# Altium PCB Arm_V2.PcbDoc
Units mil, origin at the board's own origin, x right, y up, seen from the top; angles counter-clockwise.
Board outline 5375 x 5800 mil, 2 copper layers (Top Layer, Bottom Layer); 20 components, 33 nets, 160 pads, 1 vias.
Unrouted connection lines stored in the file: 2.
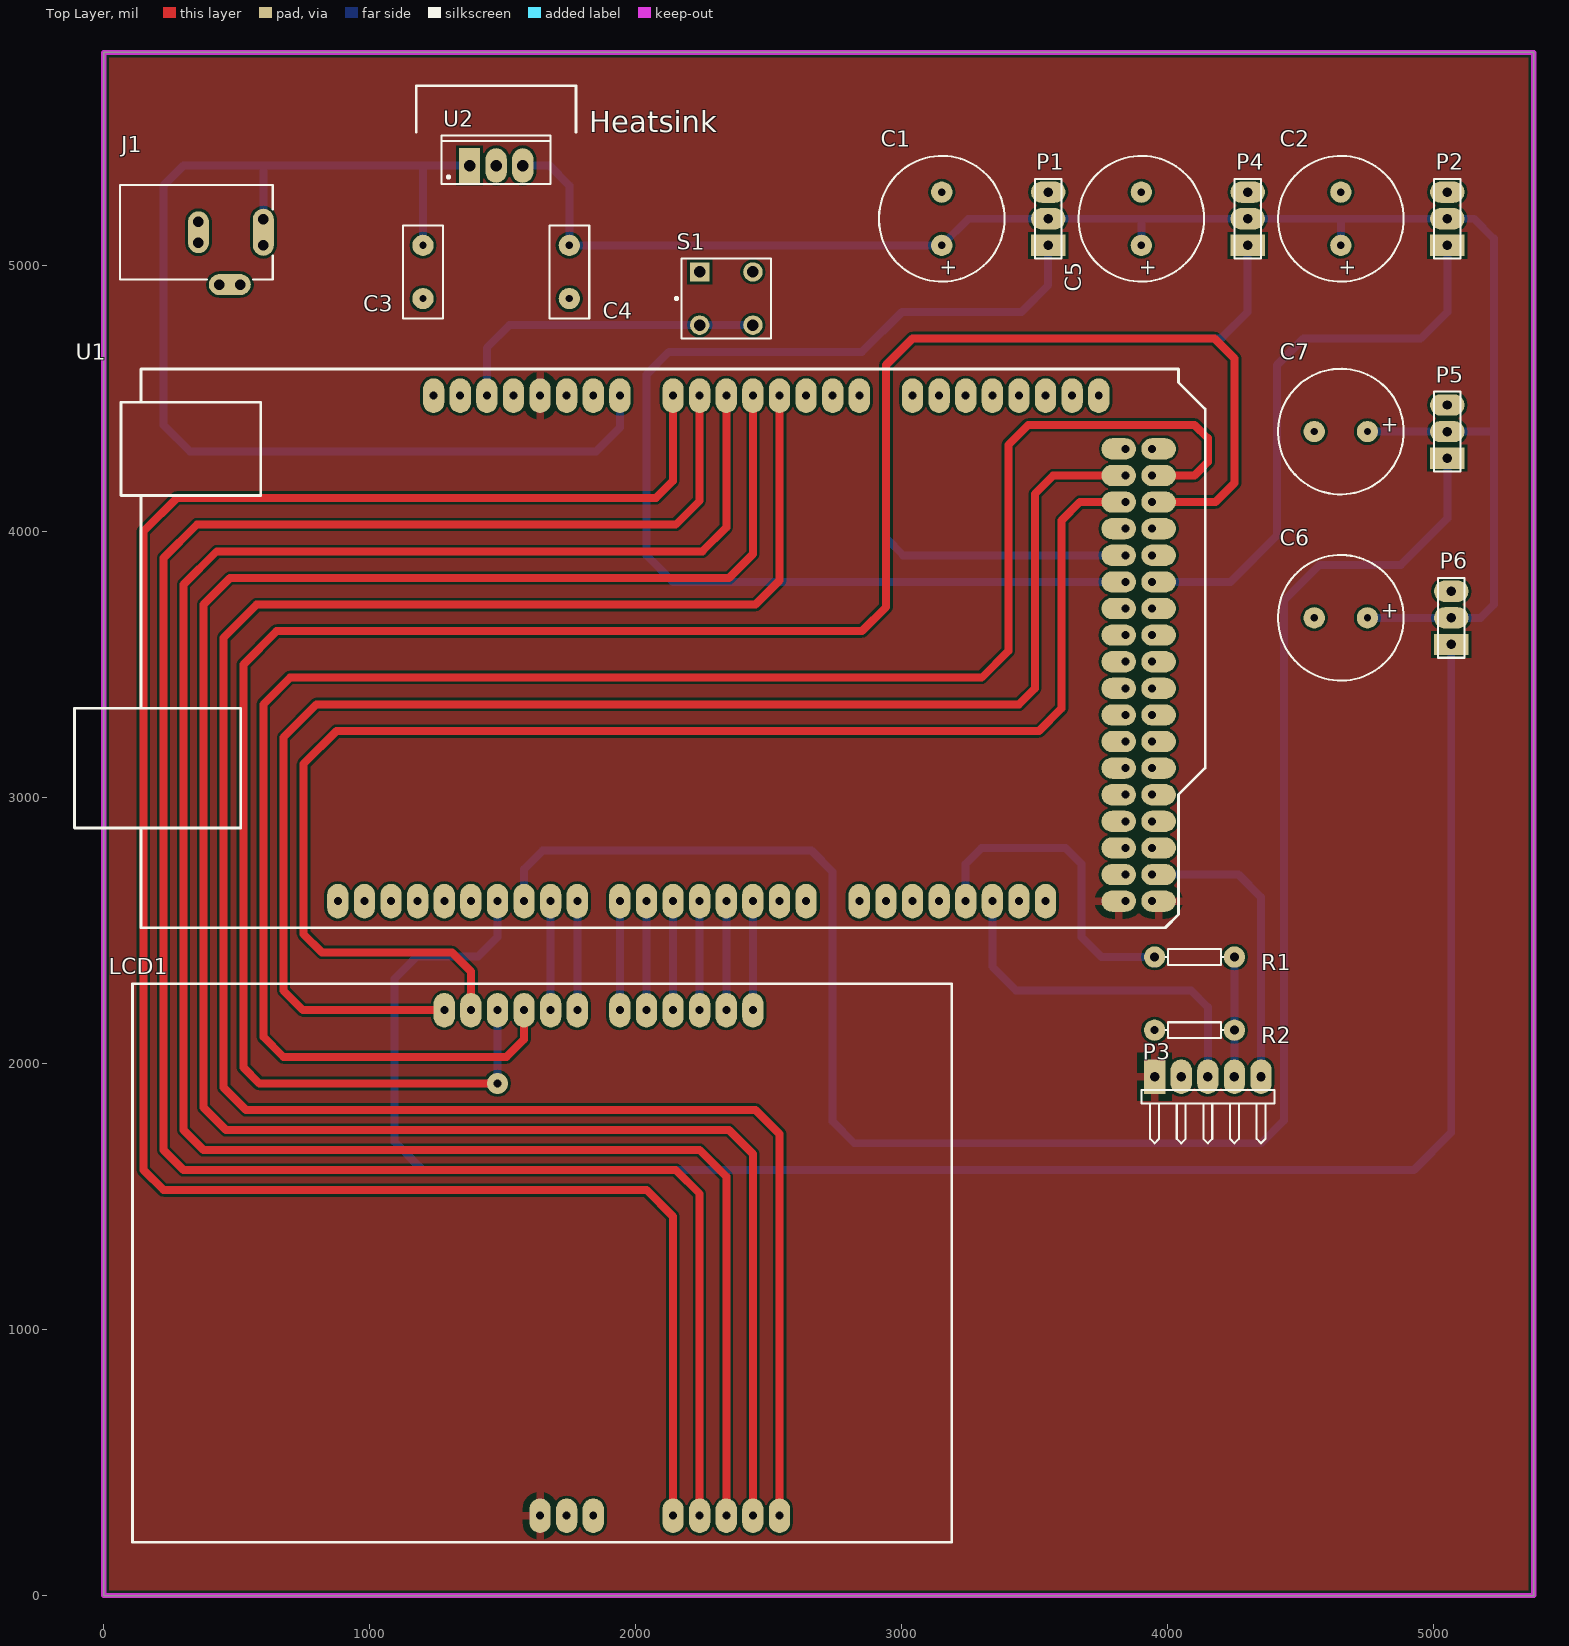
[diagram p0: Top Layer view]
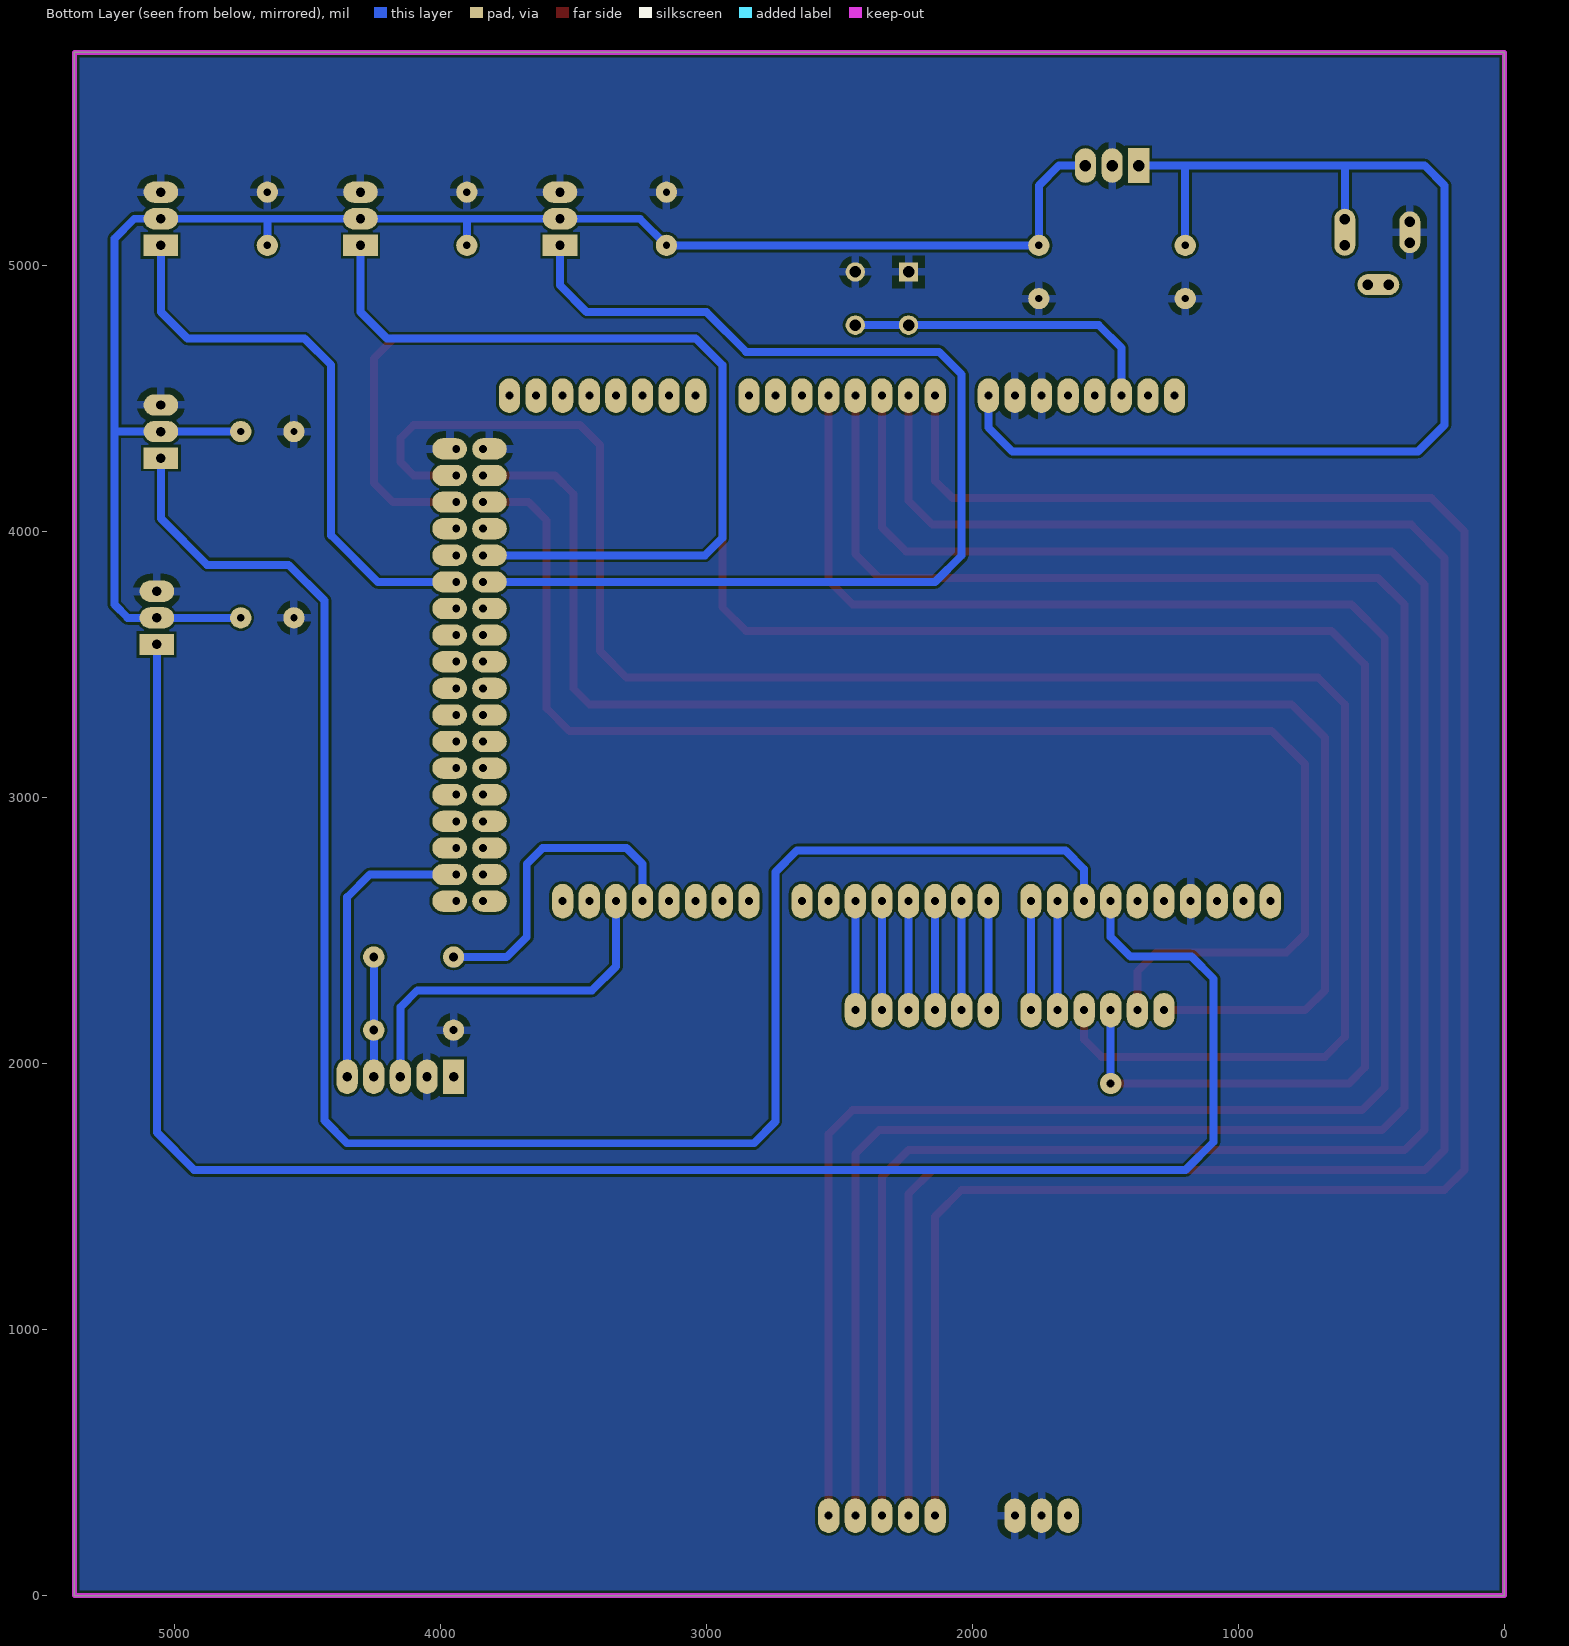
[diagram p1: Bottom Layer view, seen from below]

## Layer stack, top to bottom
Top Solder: solder mask 0.4, Solder Resist, Dk 3.5
Top Layer: signal copper 1.4
Dielectric 1: dielectric 12.6, FR-4, Dk 4.8
Bottom Layer: signal copper 1.4
Bottom Solder: solder mask 0.4, Solder Resist, Dk 3.5

## Board outline
0,0 5375,0 5375,5800 0,5800

## Design rules (kind name [scope] priority, off if disabled: settings)
Clearance [All] p1: gap=10 ignorepadtopadclearanceinfootprint=FALSE
PlaneClearance [All] p1: clearance=25
PlaneConnect [All] p1: planeconnectstyle=Relief reliefexpansion=25 reliefentries=4 reliefconductorwidth=30 reliefairgap=25
PolygonConnect [All] p1: connectstyle=Relief reliefconductorwidth=30 reliefentries=4 polygonreliefangle="90 Angle" airgapwidth=25
RoutingVias [All] p1: holewidth=30 width=80 viastyle="Through Hole" minholewidth=30 minwidth=80 maxholewidth=30 maxwidth=80
SolderMaskExpansion [All] p1: expansion=4
UnpouredPolygon [All] p1: allowunpoured=TRUE allowshelved=TRUE
Width [All] p1: maxlimit=30 minlimit=30 preferedwidth=30 minimp=50.000000 maximp=50.000000 favimp=50.000000
27 further rules are at their usual default settings.

## Components (designator, comment, footprint, x,y, rotation, side; value= is the part's Value field where it differs from the comment)
C1 "Cap Pol1" PCAP_3 3150,5175 r270 top value=470uF
C2 "Cap Pol1" PCAP_3 4650,5175 r270 top value=470uF
C3 "Cap" RAD-0.2 1200,4975 r90 top value=330nF
C4 "Cap" RAD-0.2 1750,4975 r90 top value=100nF
C5 "Cap Pol1" PCAP_3 3900,5175 r270 top value=470uF
C6 "Cap Pol1" PCAP_3 4650,3675 r0 top value=470uF
C7 "Cap Pol1" PCAP_3 4650,4375 r0 top value=470uF
J1 "PWR2.5" KLD-0202 60.63,5124.21 r0 top
LCD1 "Elegoo 2.8\" LCD_microSD" "Elegoo 2.8\" LCD w/h microSD" 108.11,200 r0 top
P1 "X_Axis" HDR1X3 3550,5075 r90 top
P2 "Y_Axis" HDR1X3 5050,5075 r90 top
P3 "HC-05" HDR1X5H 3950,1950 r0 top
P4 "Clamp" HDR1X3 4300,5075 r90 top
P5 "Header 3" HDR1X3 5050,4275 r90 top
P6 "Header 3" HDR1X3 5065,3575 r90 top
R1 "Res1" AXIAL-0.3#1 4100,2400 r180 top value=1K
R2 "Res1" AXIAL-0.3#2 4100,2125 r0 top value=2K
S1 "SW-DPST" DPST-4 2340,4825 r0 top
U1 "Arduino_Mega2560R3" ARDUINO_MEGA2560R3 140,2510 r0 top
U2 "L7805CV" TO220 1475,5375 r0 top

## Footprints (in the part's own frame and the unit in brackets; to place one, negate y for a bottom-side part, rotate by r counter-clockwise, add the part's x,y. Pads: shape width x height; smd on the part's side, far side on the other; paste and mask are expansions set on the pad)
ARDUINO_MEGA2560R3 [mil] "DIP: FOR REVERSE MOUNT"
  oval 80x130 hole 30: 0(1100,2000) 1(1200,2000) 2(1300,2000) 3(1400,2000) 4(1500,2000) 5(1600,2000) 6(1700,2000) 7(1800,2000) 8(2000,2000) 9(2100,2000) 10(2200,2000) 11(2300,2000) 12(2400,2000) 13(2500,2000) 14(2600,2000) 15(2700,2000) 16(2900,2000) 17(3000,2000) 18(3100,2000) 19(3200,2000) 20(3300,2000) 21(3400,2000) 22(3500,2000) 23(3600,2000) 24(740,100) 25(840,100) 26(940,100) 27(1040,100) 28(1140,100) 29(1240,100) 30(1340,100) 31(1440,100) 32(1540,100) 33(1640,100) 34(1800,100) 35(1900,100) 36(2000,100) 37(2100,100) 38(2200,100) 39(2300,100) 40(2400,100) 41(2500,100) 42(2700,100) 43(2800,100) 44(2900,100) 45(3000,100) 46(3100,100) 47(3200,100) 48(3300,100) 49(3400,100)
  oval 130x80 hole 30 copper offset 25,0: 50(3800,100) 51(3800,200) 52(3800,300) 53(3800,400) 54(3800,500) 55(3800,600) 56(3800,700) 57(3800,800) 58(3800,900) 59(3800,1000) 60(3800,1100) 61(3800,1200) 62(3800,1300) 63(3800,1400) 64(3800,1500) 65(3800,1600) 66(3800,1700) 67(3800,1800)
  oval 130x80 hole 30 copper offset -25,0: 68(3700,100) 69(3700,200) 70(3700,300) 71(3700,400) 72(3700,500) 73(3700,600) 74(3700,700) 75(3700,800) 76(3700,900) 77(3700,1000) 78(3700,1100) 79(3700,1200) 80(3700,1300) 81(3700,1400) 82(3700,1500) 83(3700,1600) 84(3700,1700) 85(3700,1800)
  silkscreen extent -250,0 4000,2100, body extent -100,1950 -100,1950, height 10
AXIAL-0.3#1 [mil] "Axial Device, Thru-Hole; 2 Leads; 0.3 in Pin Spacing"
  round 80 hole 33.46: 1(-150,0) 2(150,0)
  silkscreen extent -109,-30 109,30
AXIAL-0.3#2 [mil] "Axial Device, Thru-Hole; 2 Leads; 0.3 in Pin Spacing"
  round 80 hole 30: 1(-150,0)
  round 80 hole 33.46: 2(150,0)
  silkscreen extent -109,-30 109,30
DPST-4 [mm] "Switch; 4 Leads"
  rect 1.85x1.85 hole 1.1: 1(-2.54,3.81)
  round 1.85 hole 1.1: 2(-2.54,-1.27) 3(2.54,3.81) 4(2.54,-1.27)
  silkscreen extent -4.88,-2.54 4.28,5.08
"Elegoo 2.8\" LCD w/h microSD" [mil]
  oval 80x130 hole 30: 1(1531.89,100) 2(1631.89,100) 3(1731.89,100) 4(2031.89,100) 5(2131.89,100) 6(2231.89,100) 7(2331.89,100) 8(2431.89,100) 9(2331.89,2000) 10(2231.89,2000) 11(2131.89,2000) 12(2031.89,2000) 13(1931.89,2000) 14(1831.89,2000) 15(1671.89,2000) 16(1571.89,2000) 17(1471.89,2000) 18(1371.89,2000) 19(1271.89,2000) 20(1171.89,2000)
  silkscreen extent 0,0 3080,2100, body extent -100,1950 -100,1950, height 10
HDR1X3 [mil] "Connector; Header; 3 Position"
  rect 80x130 hole 35.43: 1(0,0)
  oval 80x130 hole 35.43: 2(100,0) 3(200,0)
  silkscreen extent -50,-50 250,50
HDR1X5H [mil] "Connector; Header; 5 Position; Right Angle"
  rect 80x130 hole 35.43: 1(0,0)
  oval 80x130 hole 35.43: 2(100,0) 3(200,0) 4(300,0) 5(400,0)
  silkscreen extent -50,-250 450,-50
KLD-0202 [mm] "DC Power Jack, 2.5mm, KLD Series, PCB Mount"
  oval 2x4.5 all layers, no hole: 1(13.7,0)
  round 1.5 hole 1: 1A(13.7,-1.25) 1B(13.7,1.25) 2A(7.5,-1) 2B(7.5,1) 3A(9.5,-5) 3B(11.5,-5)
  oval 2x4 all layers, no hole: 2(7.5,0)
  oval 4x2 all layers, no hole: 3(10.5,-5)
  silkscreen extent 0,-4.5 14.6,4.5
PCAP_3 [mil] "Polarized Capacitor (Radial); 2 Leads"
  round 80 hole 27.56: 1(100,0) 2(-100,0)
  silkscreen extent -236,-236 236,236
RAD-0.2 [mil] "Radial Cap, Thru-Hole; 2 Leads; 0.2 in Pin Spacing"
  round 80 hole 27.56: 1(-100,0) 2(100,0)
  silkscreen extent -175,-75 175,75
TO220 [mil] "TO, Thru-Hole, Vertical, Heatsink Mounted; 3 In-Line Leads; Pitch 2.54 mm"
  rect 80x130 hole 43.31: 1(-100,0)
  oval 80x130 hole 43.31: 2(0,0) 3(100,0)
  silkscreen extent -205,-69 205,112, body extent -207,-71 207,114, height 776

## Part data
C1 C2 C5 C6 C7: "Polarized Capacitor (Radial)", LatestRevisionDate=17-Jul-2002, LatestRevisionNote="Re-released for DXP Platform.", PackageDescription="Polarized Capacitor (Radial); 2 Leads", PackageReference=RB7.6-15, Published=8-Jun-2000, Publisher="Altium Limited"
C3 C4: "Capacitor", LatestRevisionDate=17-Jul-2002, LatestRevisionNote="Re-released for DXP Platform.", PackageDescription="Radial Cap, Thru-Hole; 2 Leads; 0.3 in Pin Spacing", PackageReference=RAD-0.3, Published=8-Jun-2000, Publisher="Altium Limited"
J1: "Low Voltage Power Supply Connector", ComponentLink1Description="Manufacturer Link", ComponentLink1URL=http://domino.kycon.com/internet/Products.html, DatasheetDocument=09-May-2002, Published=17-Dec-2003, Publisher="Altium Limited"
P1 P2 P4: library part "Header 3", "Header, 3-Pin", LatestRevisionDate=17-Jul-2002, LatestRevisionNote="Re-released for DXP Platform.", Publisher="Altium Limited"
P3: library part "Header 5H", "Header, 5-Pin, Right Angle", LatestRevisionDate=17-Jul-2002, LatestRevisionNote="Re-released for DXP Platform.", Publisher="Altium Limited"
P5 P6: "Header, 3-Pin", LatestRevisionDate=17-Jul-2002, LatestRevisionNote="Re-released for DXP Platform.", Publisher="Altium Limited"
R1 R2: "Resistor", LatestRevisionDate=17-Jul-2002, LatestRevisionNote="Re-released for DXP Platform.", PackageDescription="Axial Device, Thru-Hole; 2 Leads; 0.3 in Pin Spacing", PackageReference=AXIAL-0.3, Published=8-Jun-2000, Publisher="Altium Limited"
S1: "Double-Pole, Single-Throw Switch", LatestRevisionDate=17-Jul-2002, LatestRevisionNote="Re-released for DXP Platform.", PackageDescription="Switch; 4 Leads", PackageReference=DPST-4, Published=24-Mar-1999, Publisher="Altium Limited"
U2: "Positive Voltage Regulator, 5V, 3-Pin TO-220", ComponentLink1Description="Manufacturer URL", ComponentLink1URL=http://www.st.com, ComponentLink2Description=Datasheet, ComponentLink2URL=http://www.st.com/internet/com/TECHNICAL_RESOURCES/TECHNICAL_LITERATURE/DATASHEET/CD00000444.pdf, ComponentLink3Description="Package Specification", ComponentLink3URL=http://www.st.com/internet/com/TECHNICAL_RESOURCES/TECHNICAL_LITERATURE/PACKAGE_INFORMATION/CD00004649.pdf, DatasheetVersion=Nov-2011, PackageDescription="TO, Thru-Hole, Vertical, Heatsink Mounted; 3 In-Line Leads; Pitch 2.54 mm", PackageReference=TO220, PackageVersion=ver3.0, PartNumber=L7805CV

## Via types
v1: diameter 80, hole 30, Top Layer to Bottom Layer, 1 vias

## Nets (pads, with @x,y where several pads share a name; then routed paths per layer and width w, separated by ;. In a path a pad name is that pad's centre, name@x,y a point inside that pad or via, vN(x,y) a via of type N, cw(c..) or ccw(c..) an arc to the next point about the centre after c; other vN are vias at no path point)
3V3: U1.3
+5: LCD1.1 P3.1 U1.4 U1.50 U1.68
+E5: C1.1 C2.1 C4.2 C5.1 C6.1 C7.1 P1.2 P2.2 P4.2 P5.2 P6.2 U2.3 | length 6524.3
  Bottom Layer w30: U2.3 1675,5375 1750,5300 C4.2 C1.1 3250,5175 P1.2 3900,5175 ; C5.1 3900,5175 ; C2.1 4650,5175 ; C6.1 P6.2 5175,3675 5225,3725 5225,4375 ; C7.1 P5.2 5225,4375 ; 3900,5175 P4.2 4650,5175 ; 4650,5175 P2.2 5150,5175 5225,5100 5225,4375
GND: C1.2 C2.2 C3.1 C4.1 C5.2 C6.2 C7.2 J1.2 J1.2A J1.2B LCD1.2 LCD1.3 P1.3 P2.3 P3.2 P4.3 P5.3 P6.3 R2.1 S1.1 S1.3 U1.5 U1.6 U1.27 U1.67 U1.85 U2.2 | length 54.1
  Bottom Layer w30: LCD1.2@1740,260 LCD1.2 ; U1.5 U1.5@1750,4520
NetJ1_3: J1.3 J1.3A J1.3B
NetLCD1_4: LCD1.4 U1.8 | length 7976.2
  Top Layer w30: LCD1.4 2140,1425 2040,1525 225,1525 150,1600 150,4000 275,4125 2075,4125 2140,4190 U1.8
NetLCD1_5: LCD1.5 U1.9 | length 8017.4
  Top Layer w30: LCD1.5 2240,525 2240,1510 2150,1600 300,1600 225,1675 225,3900 350,4025 2150,4025 2240,4115 U1.9
NetLCD1_6: LCD1.6 U1.10 | length 8061.5
  Top Layer w30: LCD1.6 2340,525 2340,1575 2240,1675 375,1675 300,1750 300,3800 425,3925 2250,3925 2340,4015 U1.10
NetLCD1_7: LCD1.7 U1.11 | length 8126.4
  Top Layer w30: LCD1.7 2440,525 2440,1660 2350,1750 459.65,1750 375,1834.65 375,3725 475,3825 2350,3825 2440,3915 U1.11
NetLCD1_8: LCD1.8 U1.12 | length 8161.8
  Top Layer w30: LCD1.8 2540,1460 2540,1735 2450,1825 534.65,1825 450,1909.65 450,3600 575,3725 2450,3725 2540,3815 U1.12
NetLCD1_9: LCD1.9 U1.39 | length 410
  Bottom Layer w30: LCD1.9 U1.39
NetLCD1_10: LCD1.10 U1.38 | length 410
  Bottom Layer w30: LCD1.10 U1.38
NetLCD1_11: LCD1.11 U1.37 | length 410
  Bottom Layer w30: LCD1.11 U1.37
NetLCD1_12: LCD1.12 U1.36 | length 410
  Bottom Layer w30: LCD1.12 U1.36
NetLCD1_13: LCD1.13 U1.35 | length 410
  Bottom Layer w30: LCD1.13 U1.35
NetLCD1_14: LCD1.14 U1.34 | length 410
  Bottom Layer w30: LCD1.14 U1.34
NetLCD1_15: LCD1.15 U1.33 | length 410
  Bottom Layer w30: LCD1.15 U1.33
NetLCD1_16: LCD1.16 U1.32 | length 410
  Bottom Layer w30: LCD1.16 U1.32
NetLCD1_17: LCD1.17 U1.66 | length 7177.8
  Top Layer w30: LCD1.17 1580,2090.66 1514.34,2025 675,2025 600,2100 600,3350 700,3450 3300,3450 3400,3550 3400,4325 3475,4400 4100,4400 4150,4350 4150,4260.22 4099.78,4210 U1.66
NetLCD1_18: LCD1.18 U1.65 | length 8403.1
  Top Layer w30: v1(1480,1925) 584.65,1925 525,1984.65 525,3500 650,3625 2850,3625 2940,3715 2940,4625 3040,4725 4175,4725 4250,4650 4250,4181.32 4178.68,4110 U1.65
  Bottom Layer w30: v1(1480,1925) LCD1.18 ; U1.65 3950,4100 U1.65@3960,4110
NetLCD1_19: LCD1.19 U1.83 | length 5383.8
  Top Layer w30: LCD1.19 1380,2345.49 1308.51,2416.98 819.97,2416.98 750,2486.95 750,3125 875,3250 3515,3250 3600,3335 3600,4041.11 3668.89,4110 U1.83
NetLCD1_20: LCD1.20 U1.84 | length 5587.6
  Top Layer w30: LCD1.20 749.51,2200 675,2274.51 675,3225 800,3350 3440,3350 3500,3410 3500,4141.05 3568.95,4210 U1.84
NetP1_1: P1.1 U1.80 | length 4320.2
  Bottom Layer w30: P1.1 3550,4925 3450,4825 3000,4825 2850,4675 2125,4675 2040,4590 2040,3910 2140,3810 U1.80
NetP2_1: P2.1 U1.62 | length 2155.3
  Bottom Layer w30: U1.62 4235,3810 4410,3985 4410,4625 4510,4725 4950,4725 5050,4825 P2.1
NetP3_3: P3.3 U1.47 | length 1394.5
  Bottom Layer w30: U1.47@3350,2600 U1.47 3340,2364.34 3429.34,2275 4086.29,2275 4150,2211.29 P3.3
NetP3_4: P3.4 R1.1 R2.2 | length 450
  Bottom Layer w30: P3.4 R2.2 R1.1
NetP3_5: P3.5 U1.51 | length 1120.2
  Bottom Layer w30: U1.51 4265,2710 4350,2625 P3.5
NetP4_1: P4.1 U1.81 | length 3269.8
  Bottom Layer w30: U1.81 3005,3910 2940,3975 2940,4625 3040,4725 4200,4725 4300,4825 P4.1
NetP5_1: P5.1 U1.31 | length 6969.1
  Bottom Layer w30: U1.31 1580,2730 1650,2800 2660,2800 2740,2720 2740,1781.33 2821.33,1700 4350.43,1700 4435.49,1785.06 4435.49,3739.8 4570.03,3874.34 4876.33,3874.34 5050,4048.01 P5.1
NetP6_1: P6.1 U1.30 | length 7108.1
  Bottom Layer w30: U1.30 1480,2475 1406.45,2401.45 1176.45,2401.45 1093.05,2318.05 1093.05,1705.5 1198.55,1600 4925,1600 5065,1740 P6.1
NetR1_2: R1.2 U1.46 | length 1240.8
  Bottom Layer w30: U1.46 3240,2750 3300,2810 3615,2810 3675,2750 3675,2475.49 3750.49,2400 R1.2@3925,2400 ; R1.2@3950,2375 R1.2@3925,2400 ; R1.2 R1.2@3925,2400
NetS1_2: S1.2 S1.4 U1.2 | length 1215.2
  Bottom Layer w30: U1.2 1440,4690 1525,4775 S1.2 S1.4
VIN: C3.2 J1.1 J1.1A J1.1B U1.7 U2.1 | length 4594.8
  Bottom Layer w0: J1.1A J1.1
  Bottom Layer w30: J1.1 J1.1B 600,5375 ; C3.2 1200,5375 ; U2.1 1200,5375 ; U1.7 1940,4390 1850,4300 325,4300 225,4400 225,5300 300,5375 600,5375 ; 600,5375 1200,5375
pads on no net: U1.0 U1.1 U1.13 U1.14 U1.15 U1.16 U1.17 U1.18 U1.19 U1.20 U1.21 U1.22 U1.23 U1.24 U1.25 U1.26 U1.28 U1.29 U1.40 U1.41 U1.42 U1.43 U1.44 U1.45 U1.48 U1.49 U1.52 U1.53 U1.54 U1.55 U1.56 U1.57 U1.58 U1.59 U1.60 U1.61 U1.63 U1.64 U1.69 U1.70 U1.71 U1.72 U1.73 U1.74 U1.75 U1.76 U1.77 U1.78 U1.79 U1.82

## Polygon pours and split planes (outlines as drawn)
GND on Bottom Layer "Bottom Layer-GND" (solid, pour order 20): 0,0 0,5800 5375,5800 5375,0
no net on Bottom Layer "Bottom Layer-No Net" (solid, pour order 2): 0,325
+5 on Top Layer "Top Layer-+5" (solid, pour order 22): 0,0 0,5800 5375,5800 5375,0
no net on Top Layer "Top Layer-No Net" (solid, pour order 18): 4825,5950

## Keep-outs
Keep-Out Layer:
  the board outline again, w20

## Silkscreen, mask and mechanical layers (free items; w line width, h text height)
Top Overlay:
  lines w10: 1175,5500 1175,5675 1775,5675 1775,5500
  text "Heatsink" at 1825,5500 h80

## Text inside footprints (layer, text, board x,y; h text height)
C1: Top Overlay "+" at 3150,5025 h59.06 r270
C2: Top Overlay "+" at 4650,5025 h59.06 r270
C5: Top Overlay "+" at 3900,5025 h59.06 r270
C6: Top Overlay "+" at 4800,3675 h59.06
C7: Top Overlay "+" at 4800,4375 h59.06
J1: Mechanical 1 "Mech 2 - Clearance, move to internal plane if present" at 71.89,5323.66 h11.81; Mechanical 1 "Mech 1 - Slot cut-out" at 71.89,5343.34 h11.81; Mechanical 1 "Assign keep-out area to slot" at 71.89,5382.71 h11.81; Mechanical 1 "Alert PCB fab to slot details" at 71.89,5363.03 h11.81